# Altium PCB Buck_Eval_Board.PcbDoc
Units mil, origin at the board's own origin, x right, y up, seen from the top; angles counter-clockwise.
Board outline 1945 x 1795 mil, 4 copper layers (Top Layer, Int1 (GND), Int2 (PWR), Bottom Layer), stack 53.912 mil thick; 33 components, 11 nets, 65 pads, 140 vias.
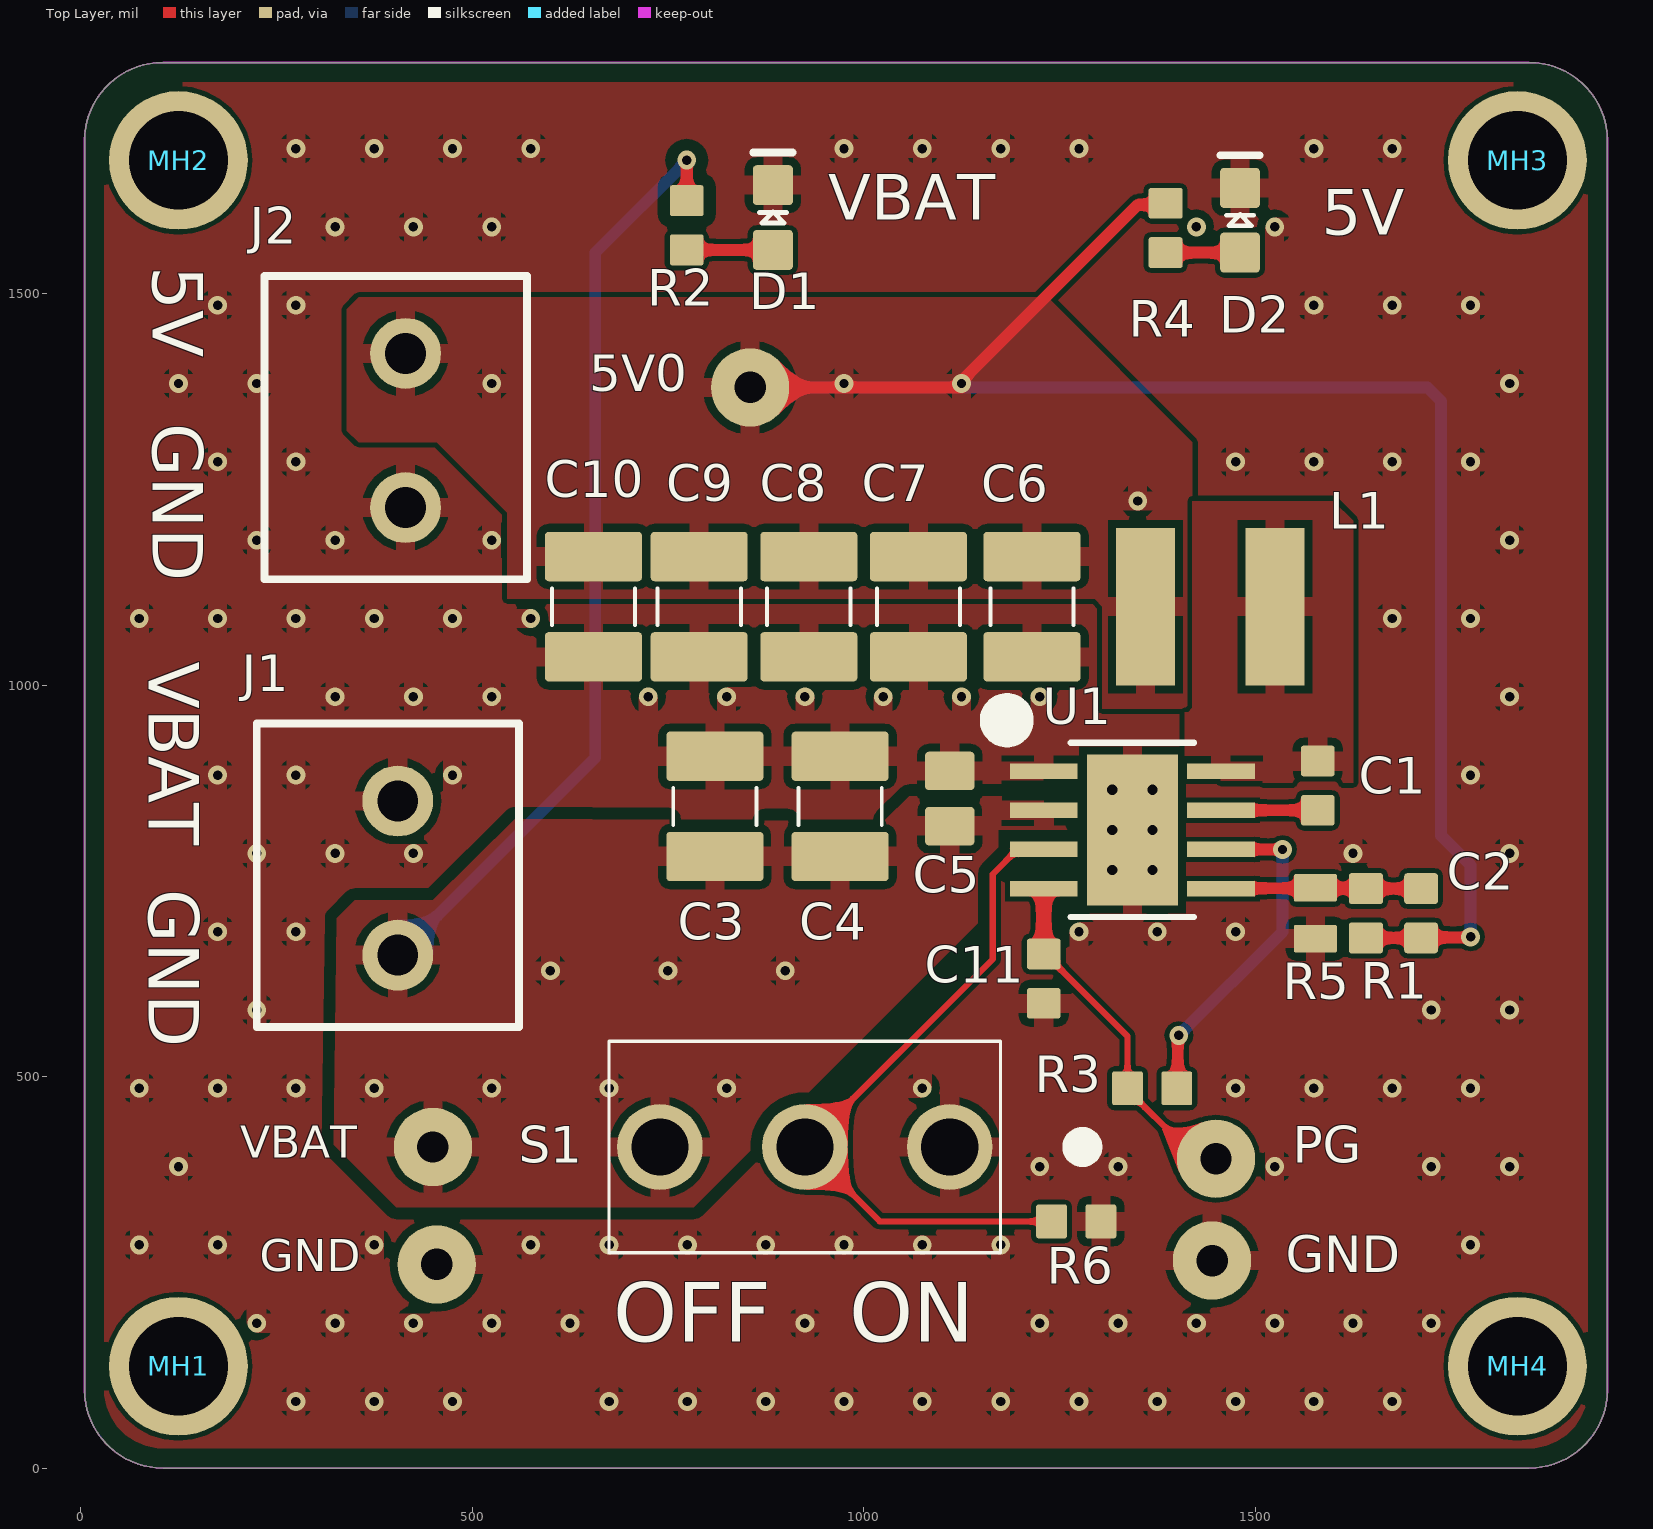
[diagram p0: Top Layer view]
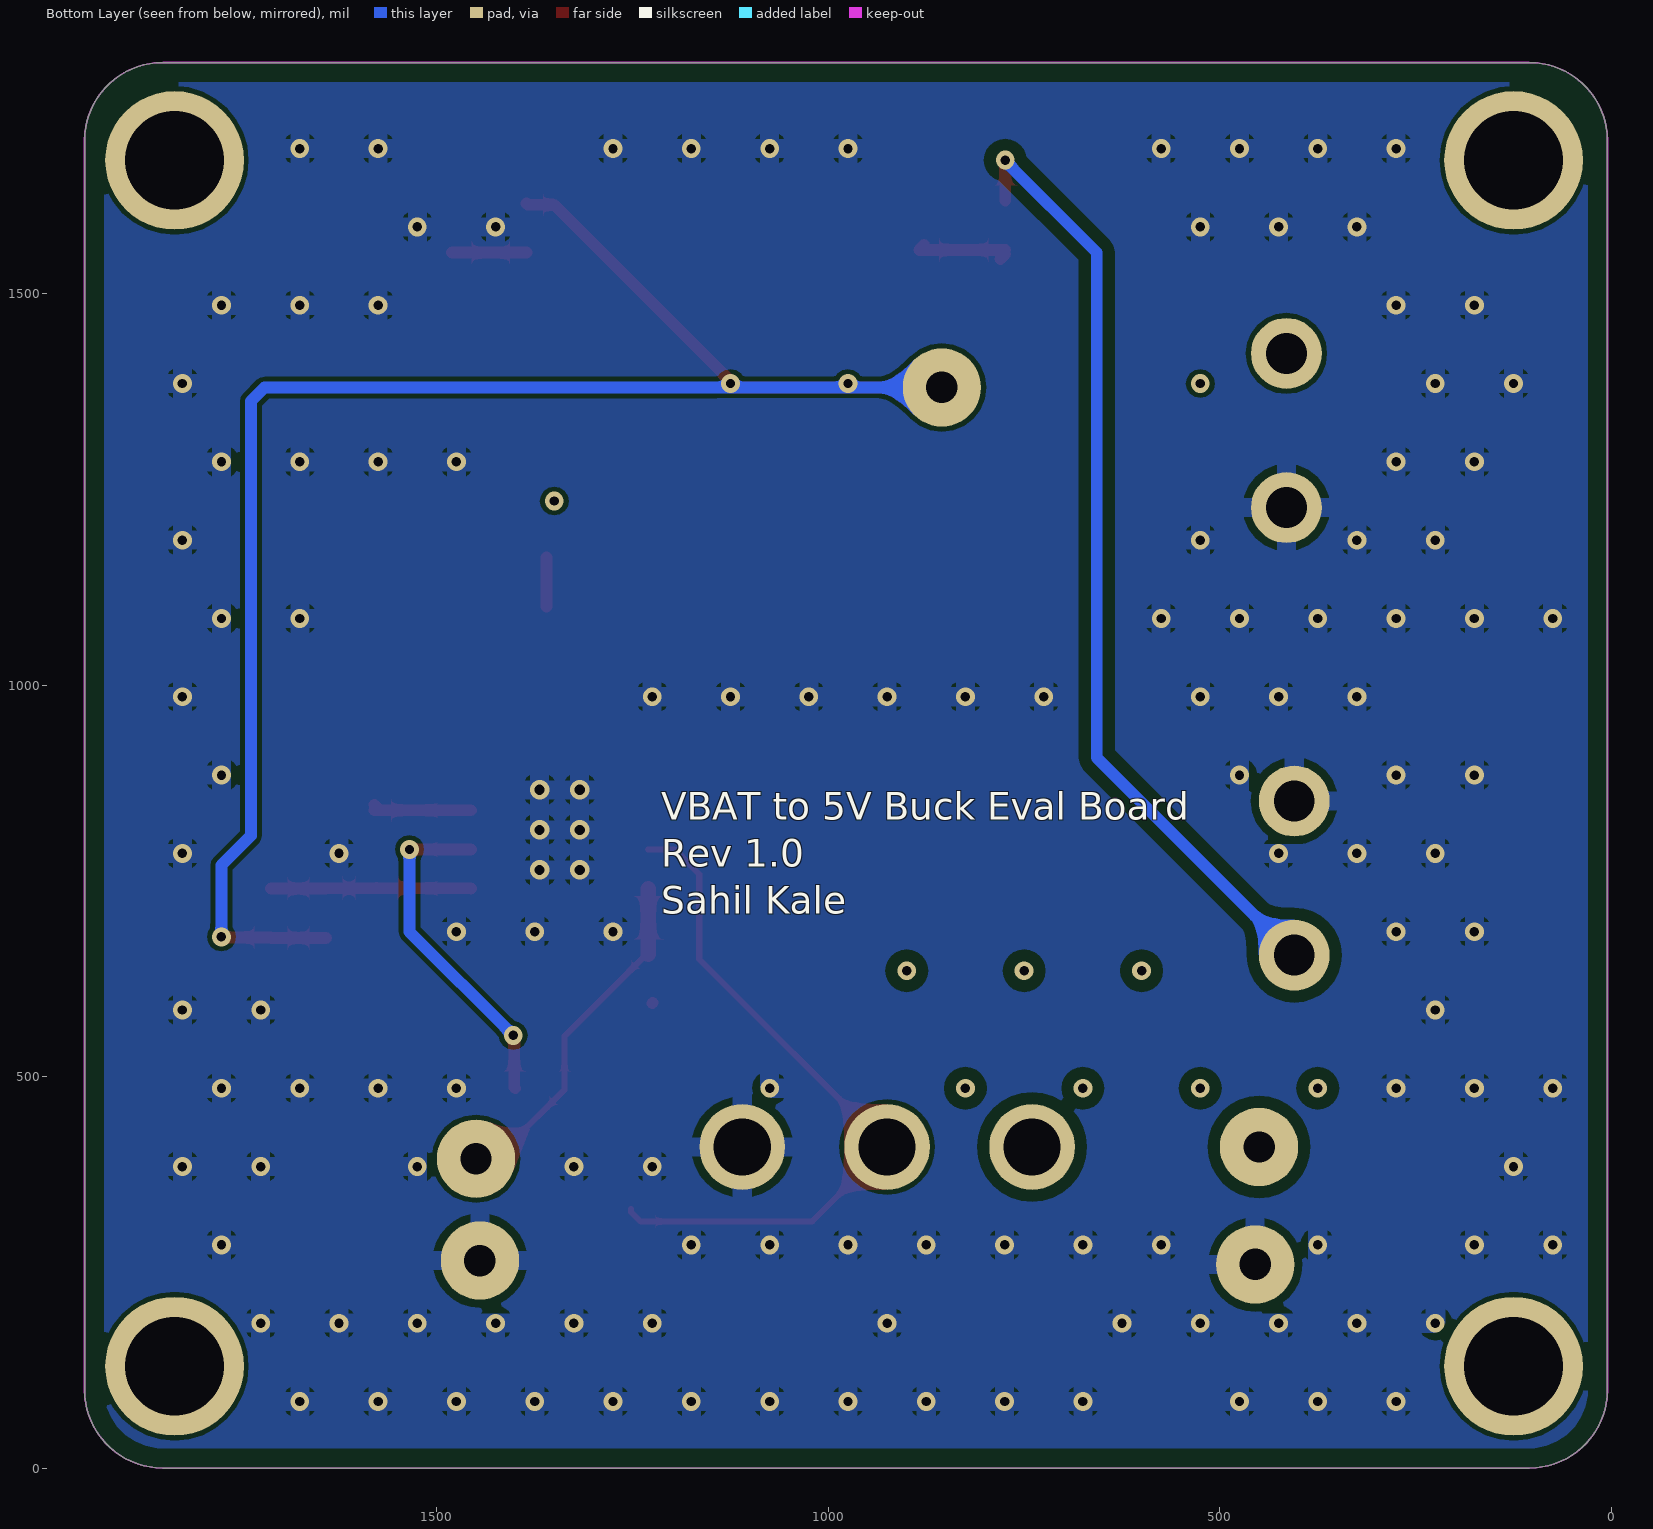
[diagram p1: Bottom Layer view, seen from below]
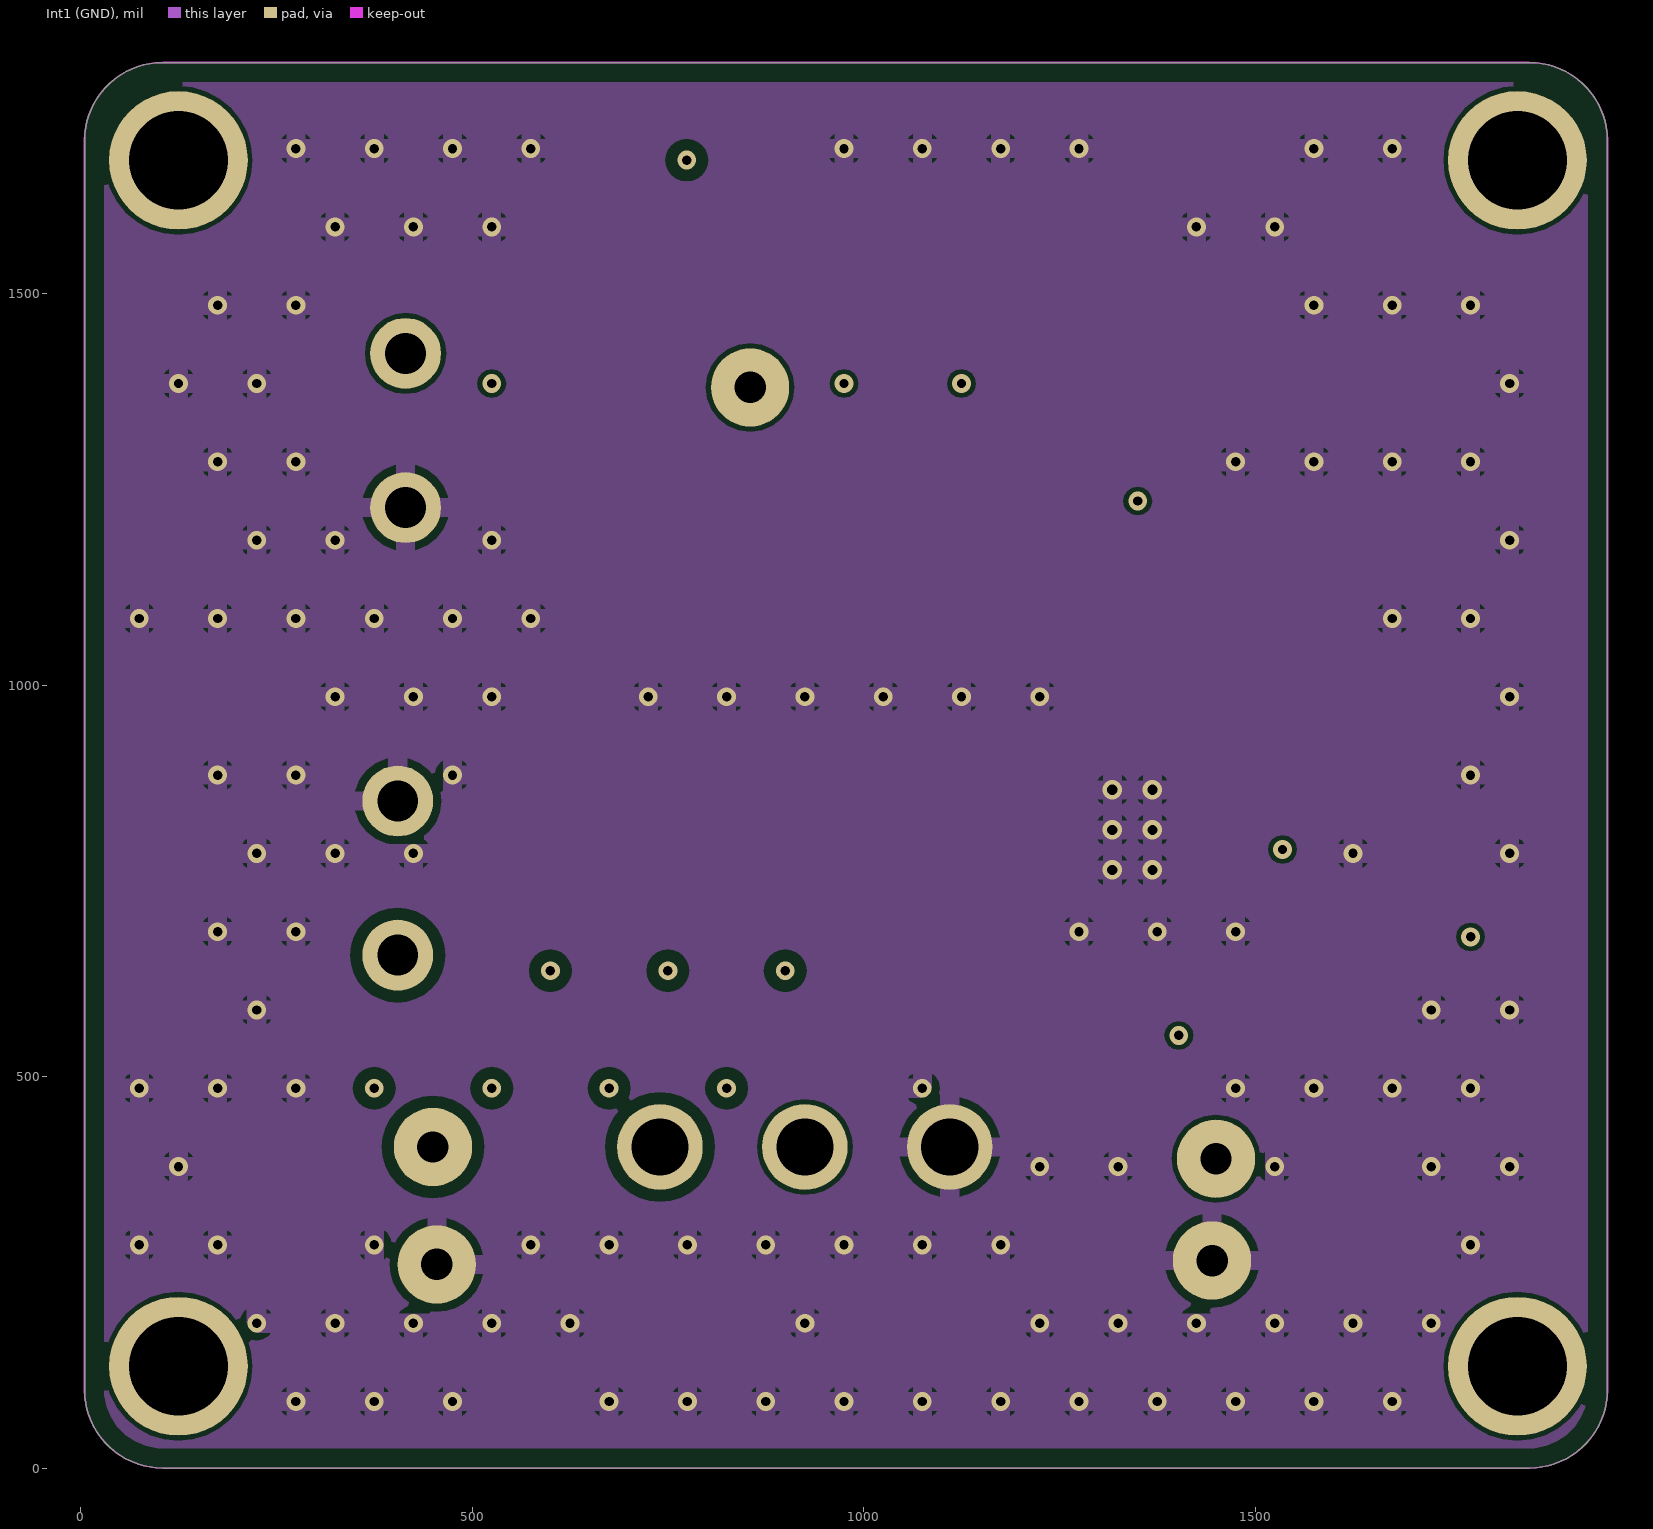
[diagram p2: Int1 (GND)]
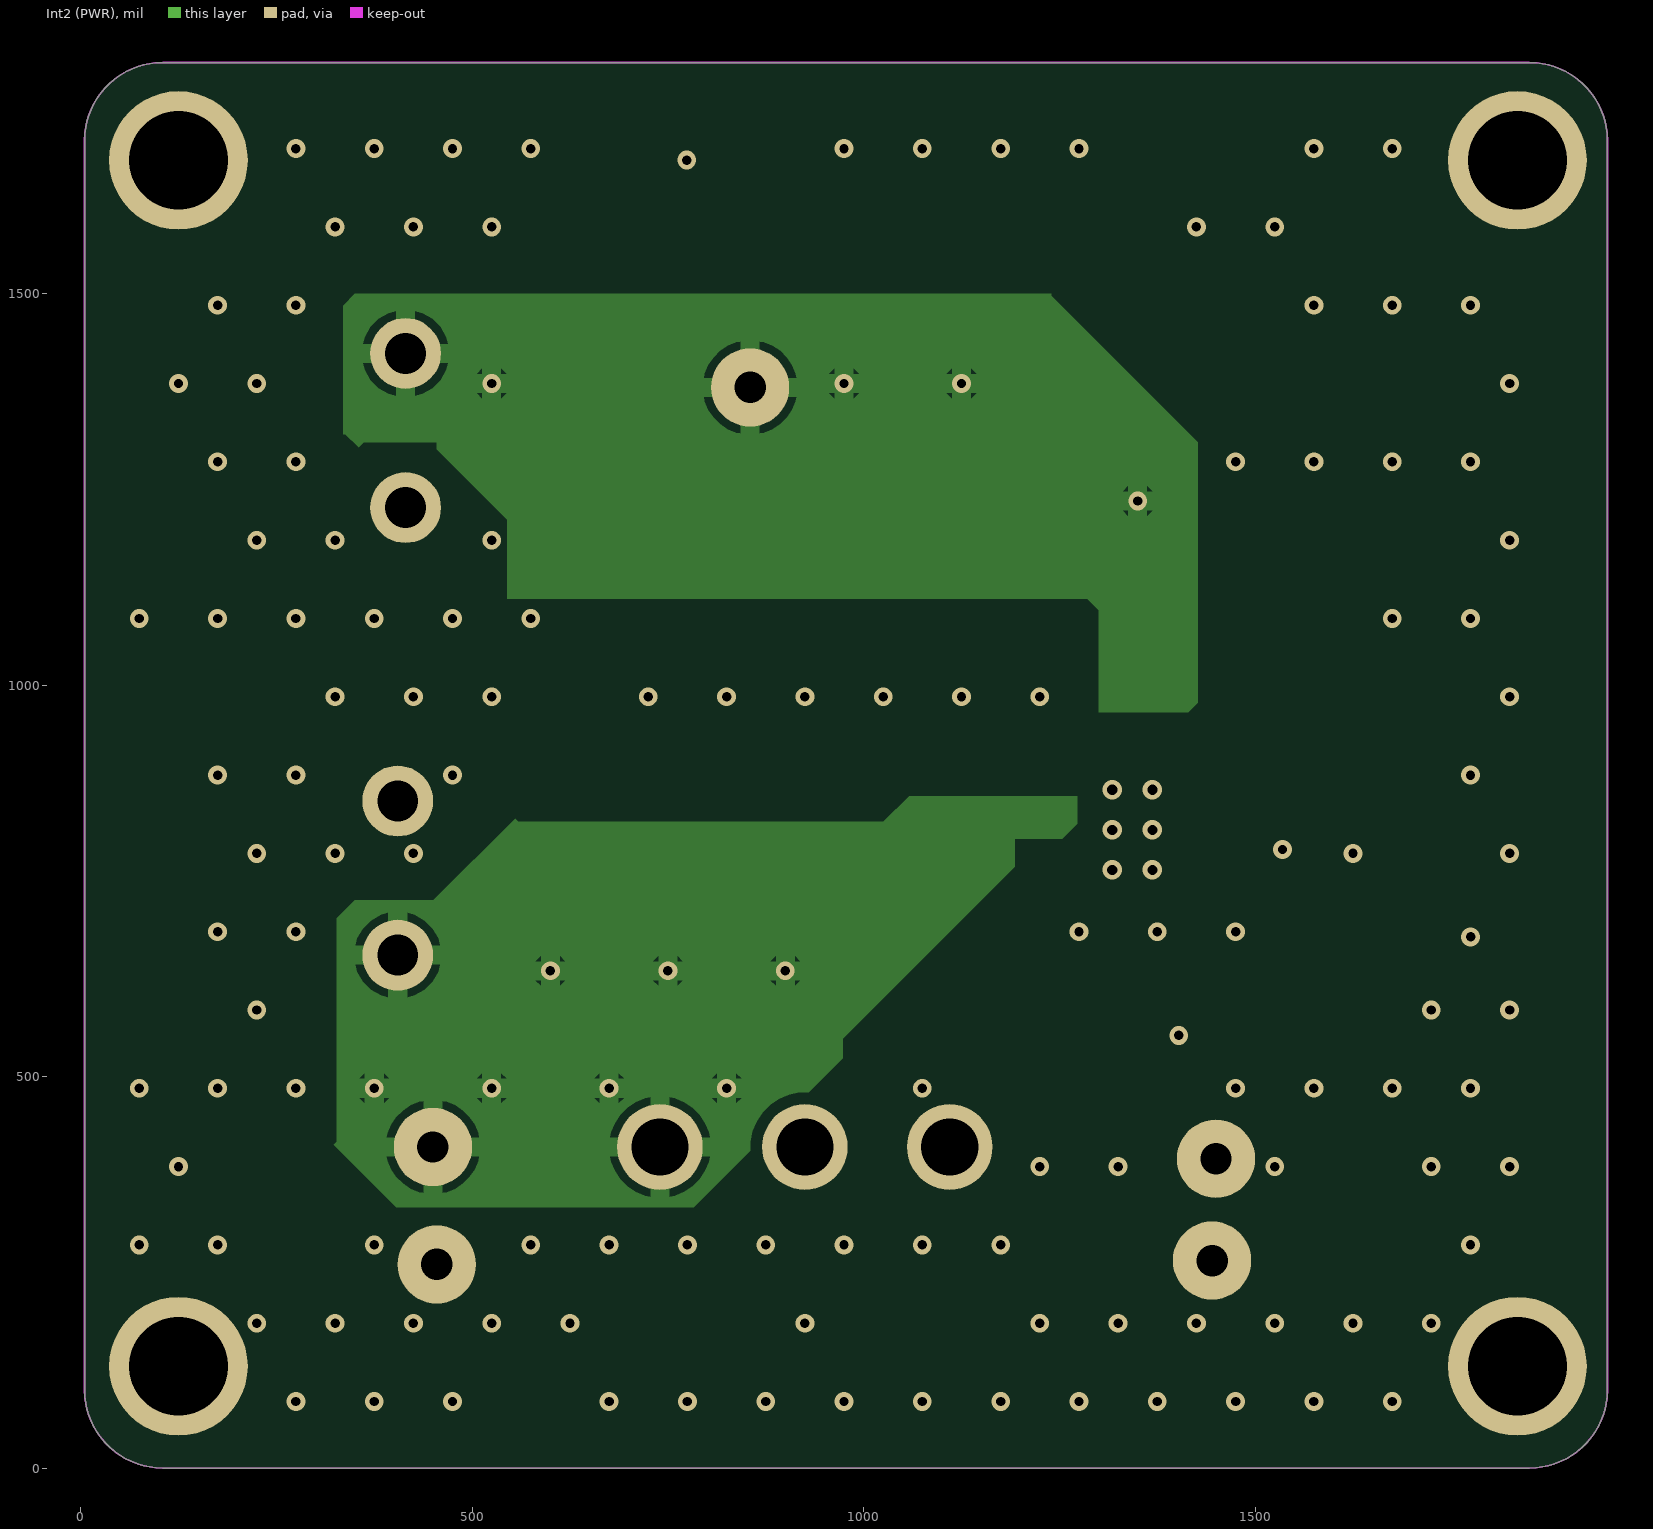
[diagram p3: Int2 (PWR)]
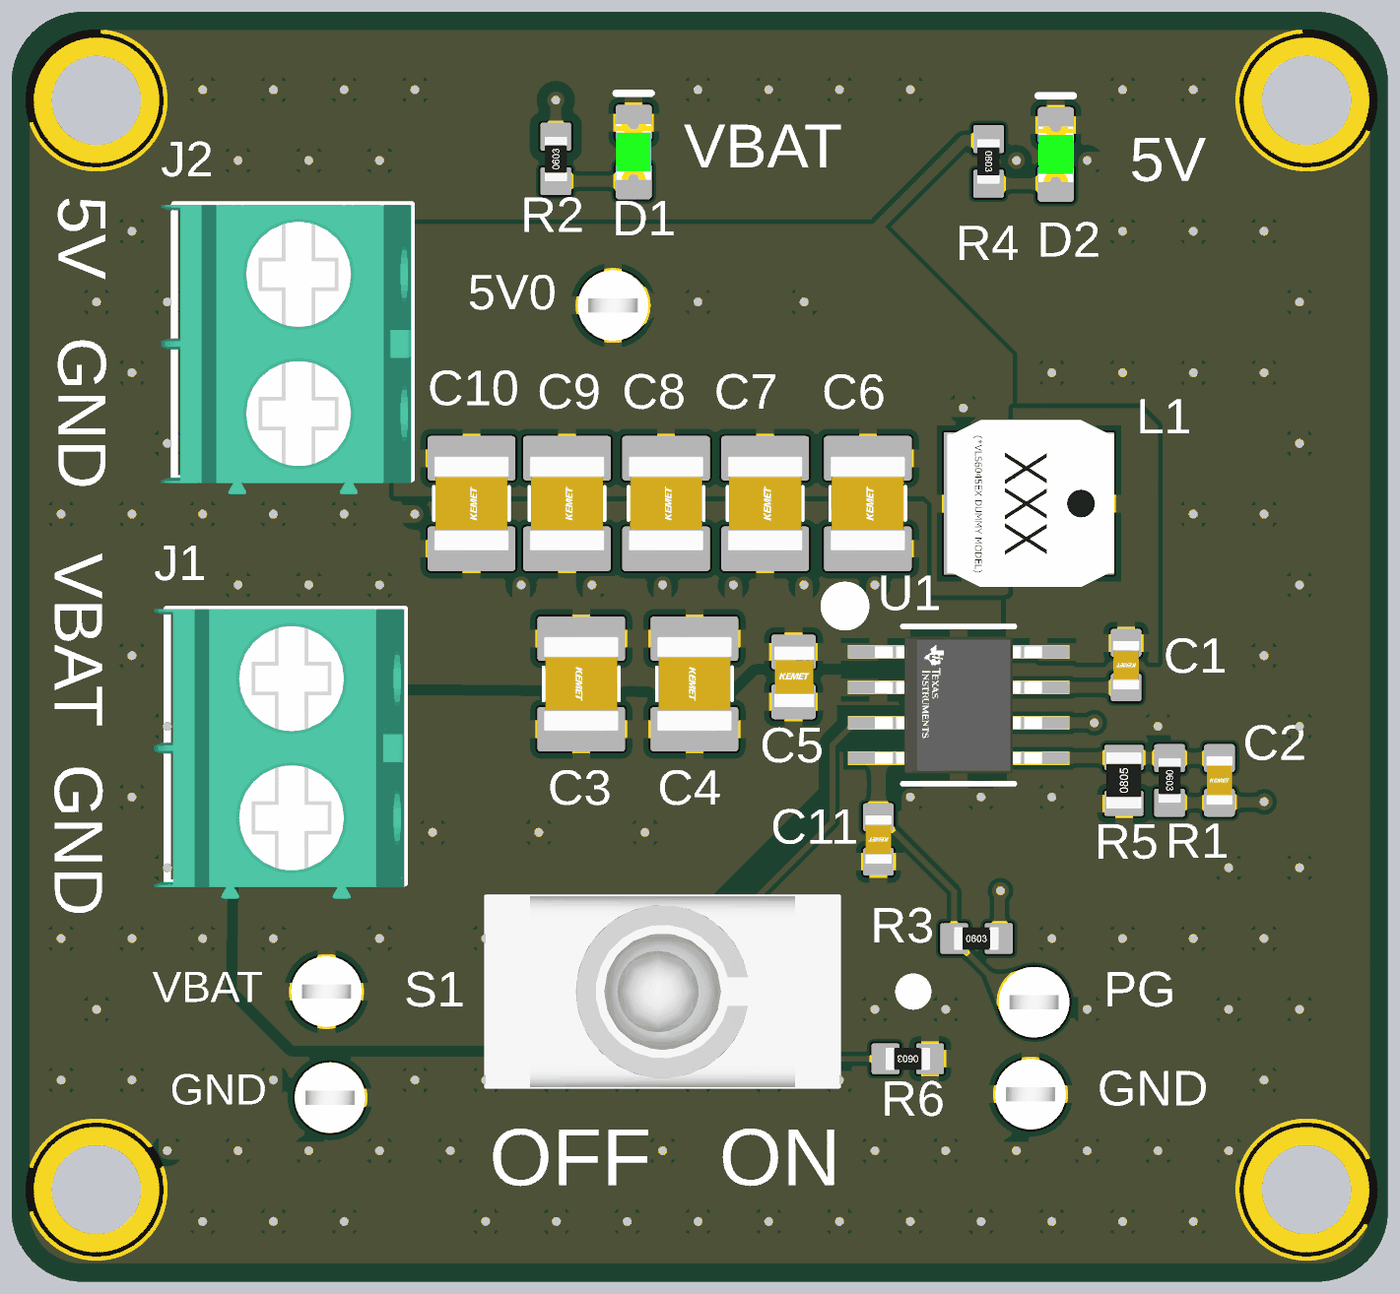
[diagram p4: 3D render of the assembled board from above, using the file's embedded part models]

## Layer stack, top to bottom
Top Solder: solder mask 1, SM-001, Dk 4
Top Layer: signal copper 1.378
Dielectric 1: prepreg 5.1, PP-017, Dk 4.3
Dielectric 2: prepreg 5.1, PP-017, Dk 4.3
Int1 (GND): signal copper 1.378
Dielectric 3: core 28, Core-039, Dk 4.8
Int2 (PWR): signal copper 1.378
Dielectric 4: prepreg 5.1, PP-017, Dk 4.3
Dielectric 5: prepreg 5.1, PP-017, Dk 4.3
Bottom Layer: signal copper 1.378
Bottom Solder: solder mask 1, SM-001, Dk 4

## Board outline
5,100 ccw(c105,100) 105,0 1850,0 ccw(c1850,100) 1950,100 1950,1695 ccw(c1850,1695) 1850,1795 105,1795 ccw(c105,1695) 5,1695

## Design rules (kind name [scope] priority, off if disabled: settings)
BoardOutlineClearance [All] p1: gap=25 ignorepadtopadclearanceinfootprint=FALSE
Clearance "Stitching GND" [IsStitchingVia and InNet('GND') vs (IsVia and (Not IsStitchingVia)) Or IsPad] p1: gap=5 ignorepadtopadclearanceinfootprint=FALSE
Clearance "Stitching 5V0" [IsStitchingVia and InNet('5V0') vs (IsVia and (Not IsStitchingVia)) Or IsPad] p2: gap=10 ignorepadtopadclearanceinfootprint=FALSE
Clearance Clearance_VBAT [InNet('VBAT')] p3: gap=15 ignorepadtopadclearanceinfootprint=TRUE
Clearance [All] p4: gap=6 ignorepadtopadclearanceinfootprint=TRUE except(10: Arc-Hole Track-Hole SMDPad-Hole THPad-Hole Via-Hole Fill-Hole Poly-Hole Region-Hole Text-Hole)
ComponentClearance [All] p1: gap=4 collisioncheckmode=3 verticalgap=4 showdistances=TRUE
HoleSize [All] p1: absolutevalues=TRUE maxlimit=248.03 minlimit=7.87 maxpercent=80.000 minpercent=20.000
HoleToHoleClearance [All] p1: gap=9.84 allowstackedmicrovias=FALSE
MinimumAnnularRing [All] p1: minimumring=3
MinimumSolderMaskSliver [All] p1: minsoldermaskwidth=0
PolygonConnect PolygonConnect_HighCurrent [InNet('VBAT') or InNet('SW') or InNet('5V0') or InNet('GND')] p1: connectstyle=Relief reliefconductorwidth=25 reliefentries=4 polygonreliefangle="90 Angle" airgapwidth=10
PolygonConnect [All] p2: thpad.connectstyle=Direct thpad.reliefconductorwidth=4 thpad.reliefentries=4 thpad.polygonreliefangle="90 Angle" thpad.airgapwidth=4 smdpad.connectstyle=Relief smdpad.reliefconductorwidth=4 smdpad.reliefentries=4 smdpad.polygonreliefangle="90 Angle" smdpad.airgapwidth=4 via.connectstyle=Direct via.reliefconductorwidth=4 via.reliefentries=4 via.polygonreliefangle="90 Angle" via.airgapwidth=4
RoutingVias [All] p1: holewidth=7.87 width=17.72 viastyle="Through Hole" minholewidth=7.87 minwidth=17.72 maxholewidth=248.03 maxwidth=257.87
SilkToSilkClearance [All] p1: silktosilkclearance=0
SilkToSolderMaskClearance [IsPad] p1: minsilkscreentomaskgap=4 clearancetoexposedcopper=TRUE
SolderMaskExpansion SolderMaskExpansion_Via [IsVia] p1: expansion=4 istentingtop=TRUE
SolderMaskExpansion [All] p2: expansion=2.95 istentingtop=FALSE
Width [All] p1: maxlimit=71497.94 minlimit=4 preferedwidth=4
24 further rules are at their usual default settings.

## Components (designator, comment, footprint, x,y, rotation, side; value= is the part's Value field where it differs from the comment)
5V0 "TESTPOINT_LOOP" TESTPOINT_LOOP 855,1380 r0 top (schematic designator TP2)
C1 "CAP_0.1uF_50V_0603" CAP0603 1580,871.5 r90 top value=0.1μF
C2 "CAP_6.8pF_50V_0603" CAP0603 1711.96,708.5 r270 top value=6.8pF
C3 "CAP_10uF_100V_1210" CAP1210 810,845 r270 top value=10μF
C4 "CAP_10uF_100V_1210" CAP1210 970,845 r270 top value=10μF
C5 "CAP_0.22uF_50V_0805" CAP2012 1110,855 r270 top value=0.22μF
C6 "CAP_10uF_100V_1210" CAP1210 1215,1100 r90 top value=10μF
C7 "CAP_10uF_100V_1210" CAP1210 1070,1100 r90 top value=10μF
C8 "CAP_10uF_100V_1210" CAP1210 930,1100 r90 top value=10μF
C9 "CAP_10uF_100V_1210" CAP1210 790,1100 r90 top value=10μF
C10 "CAP_10uF_100V_1210" CAP1210 655,1100 r90 top value=10μF
C11 "CAP_1uF_25V_0603" CAP0603 1230,625 r90 top value=1μF
D1 "LED_GREEN" LED_0805_GREEN 884.11,1597 r90 top
D2 "LED_GREEN" LED_0805_GREEN 1480.66,1593.55 r90 top
GND "TESTPOINT_LOOP" TESTPOINT_LOOP 455,260 r0 top (schematic designator TP4)
GND "TESTPOINT_LOOP" TESTPOINT_LOOP 1445,265 r0 top (schematic designator TP5)
J1 "CON_2POS_SCREW_TERM" 1935161 405,753.43 r270 top
J2 "CON_2POS_SCREW_TERM" 1935161 415,1325 r270 top
L1 "IND_4.7uH_4.2A" VLS6045EX-4R7M 1525.35,1100 r180 top
MH1 "MOUNTING_HOLE_M3" MOUNTING_HOLE_3mm#1 125,130 r0 top
MH2 "MOUNTING_HOLE_M3" MOUNTING_HOLE_3mm#2 155,1670 r0 top
MH3 "MOUNTING_HOLE_M3" MOUNTING_HOLE_3mm#1 1835,1670 r0 top
MH4 "MOUNTING_HOLE_M3" MOUNTING_HOLE_3mm#1 1835,130 r0 top
PG "TESTPOINT_LOOP" TESTPOINT_LOOP 1450,395 r0 top (schematic designator TP3)
R1 "RES_100kΩ_0603_1%" RESC0603 1641.51,740 r270 top value=100kΩ
R2 "RES_4.7kΩ_0603" RESC0603 774.11,1555.66 r90 top value=4.7kΩ
R3 "RES_100kΩ_0603_1%" RESC0603 1337.01,485 r0 top value=100kΩ
R4 "RES_510Ω_0603" RESC0603 1385.66,1615.21 r270 top value=510Ω
R5 "RES_24.9kΩ_0805_1%_1" RESC0805 1576.96,708.5 r90 top value=24.9kΩ
R6 "RES_100kΩ_0603_1%" RESC0603 1302.99,315 r180 top value=100kΩ
S1 "SW_TOGGLE_SPDT" 100SP1T1B4M2QE 924.96,410 r180 top
U1 "BUCK_LMR33640DDDAR" "8-SO PowerPad" 1343.19,815 r0 top
VBAT "TESTPOINT_LOOP" TESTPOINT_LOOP 450,410 r0 top (schematic designator TP1)

## Footprints (in the part's own frame and the unit in brackets; to place one, negate y for a bottom-side part, rotate by r counter-clockwise, add the part's x,y. Pads: shape width x height; smd on the part's side, far side on the other; paste and mask are expansions set on the pad)
"8-SO PowerPad" [mm]
  rect 2.2x0.5 smd paste-1000 mask+0: 1(-2.875,1.905) 2(-2.875,0.635) 3(-2.875,-0.635) 4(-2.875,-1.905) 5(2.875,-1.905) 6(2.875,-0.635) 7(2.875,0.635) 8(2.875,1.905)
  rect 2.95x4.9 smd paste-1000 mask-1000: 9(0,0)
  silkscreen extent -4.51,-2.83 2,3.99, body extent -4.08,-2.68 4.08,2.68, height 0.25
100SP1T1B4M2QE [mm]
  round 2.775 hole 1.85: 1(-4.7,0) 2(0,0) 3(4.7,0)
  silkscreen extent -9.3,-3.43 6.35,3.43, body extent -6.35,-3.43 6.35,3.43, height 29.63
1935161 [mm] "TERM BLK 2POS SIDE ENTRY 5MM PCB"
  round 2.3 hole 1.325: 1(-2.5,0) 2(2.5,0)
  silkscreen extent -5.01,-4.57 4.83,3.94, body extent -5.01,-5.06 5.39,3.94, height 11.41
CAP0603 [mm]
  rrect20% 1x1.1 smd: 1(-0.8,0) 2(0.8,0)
  body extent -0.87,-0.48 0.88,0.48, height 0.87
CAP1210 [mm]
  rrect15% 1.6x3.15 smd: 1(-1.625,0) 2(1.625,0)
  silkscreen extent -0.6,-1.35 0.6,1.35, body extent -1.7,-1.35 1.7,1.35, height 2.1
CAP2012 [mm]
  rrect20% 1.25x1.6 smd: 1(-0.895,0) 2(0.895,0)
  body extent -1.1,-0.7 1.1,0.75, height 1.41
LED_0805_GREEN [mm] "SMD, 2-Leads, Body 2x1.25mm"
  rrect20% 1.3x1.3 smd: 1(-1.05,0) 2(1.05,0)
  silkscreen extent -0.18,-0.63 2.11,0.64, body extent -1,-0.62 1,0.63, height 1.12
MOUNTING_HOLE_3mm#1 [mm] "3mm Hole"
  round 4.5 hole 3.2 mask+0.3: 0(0,0)
MOUNTING_HOLE_3mm#2 [mm] "3mm Hole"
  round 4.5 hole 3.2 mask+0.3: 0(-0.762,0)
RESC0603 [mm] "Chip Resistor, Body 1.6x0.8mm, IPC Medium Density"
  rrect15% 1x1.1 smd: 1(0,0) 2(1.6,0)
  body extent 0,-0.4 1.6,0.4, height 0.46
RESC0805 [mm] "Chip Resistor, 2-Leads, Body 2.00x1.25mm, IPC High Density"
  rrect15% 0.9x1.4 smd: 1(-0.825,0) 2(0.825,0)
  body extent -1,-0.62 1,0.63, height 0.61
TESTPOINT_LOOP [mm]
  round 2.54 hole 1.02: 1(0,0)
  body extent -1.27,-1.27 1.27,1.27, height 4.57
VLS6045EX-4R7M [mm]
  rect 1.9x5.1 smd: 1(0,0) 2(4.2,0)
  body extent -0.97,-3 5.03,3, height 4.5

## Part data
5V0 GND GND PG VBAT: "TESTPOINT THRUHOLE", Manufacturer 1="Keystone Electronics", Manufacturer Part Number 1=5002, Package/Footprint=TH, Supplier Part Number 1=36-5002-ND, Mounting Type=TH, Supplier 1=Digi-Key
C1: "CAP CER 0.1UF 50V X7R 0603", Dielectric=X7R, Manufacturer 1=Yageo, Manufacturer Part Number 1=CC0603KRX7R9BB104, Package/Footprint=0603, Supplier Part Number 1=311-1344-1-ND, Voltage Rating=50V, Mounting Type=SMD, Supplier 1=Digi-Key
C2: "CAP CER 6.8PF 50V", Dielectric=C0G, Manufacturer 1=Yageo, Manufacturer Part Number 1=CGA3E2C0G1H6R8D080AD, Package/Footprint=0603, Supplier Part Number 1=445-9798-1-ND, Voltage Rating=50V, Mounting Type=SMD, Supplier 1=Digi-Key, Supplier Part Number 21=445-9798-1-ND
C3 C4 C6 C7 C8 C9 C10: "CAP CER 10uF 100V X7S 10% 1210", Dielectric=X7S, Manufacturer 1=Murata, Manufacturer Part Number 1=GRM32EC72A106KE05L, Package/Footprint=1210, Supplier Part Number 1=490-16266-1-ND, Voltage Rating=100V, Mounting Type=SMD, Supplier 1=Digi-Key
C5: "CAP CER 0.22UF 50V X7R 0805", Dielectric=X7R, LCSC Part #=C5378, Manufacturer 1=KEMET, Manufacturer Part Number 1=C0805C224K5RACTU, Package/Footprint=0805, Supplier Part Number 1=399-3491-1-ND, Voltage Rating=50V, Mounting Type=SMD, Supplier 1=Digi-Key
C11: "CAP CER 1UF 25V X5R 0603", Dielectric=X5R, Manufacturer 1=Samsung, Manufacturer Part Number 1=CL10A105KA8NNNC, Package/Footprint=0603, Supplier Part Number 1=1276-1102-1-ND, Voltage Rating=25V, Mounting Type=SMD, Supplier 1=Digi-Key
D1 D2: "LED GREEN DIFFUSED 0805 SMD", Forward Voltage Drop=2.2V, Manufacturer 1=OSRAM, Manufacturer Part Number 1="LG R971-KN-1", Package/Footprint=0805, Supplier Part Number 1=475-1410-1-ND, Mounting Type=SMD, Supplier 1=Digi-Key
J1 J2: "TERM BLK 2POS SIDE ENTRY 5MM", Manufacturer 1="Phoenix Contact", Manufacturer Part Number 1=1935161, Package/Footprint=SMD, Supplier Part Number 1=277-1667-ND, Mounting Type=TH, Supplier 1=Digi-Key
L1: "FIXED IND 4.7UH 4.2A 35MOHM SMD", Case/Size Code=2424, DC Resistance (DCR)=27mR, Inductance-Nom (L)=4.7uH, Inductor Application="POWER INDUCTOR", Inductor Type="GENERAL PURPOSE INDUCTOR", Manufacturer=TDK, Manufacturer Part Number 1=VLS6045EX-4R7M, Max Operating Temperature=105°C, Min Operating Temperature=-40°C, Package Height=4.5mm, Package Length=6mm, Package Style=SMTMeter, Rated Current-Max=4.2A, Supplier Part Number 1=445-173055-1-ND, Test Frequency=100kHz, Tolerance=20%, Category="Fixed Inductors", ComponentLink1Description=https://datasheet.ciiva.com:443/pdfs/VipMasterIC/IC/TDKC/TDKC-S-A0006138306/TDKC-S-A0006138306-1.pdf?src-supplier=IHS+Markit, ComponentLink1URL=https://datasheet.ciiva.com:443/pdfs/VipMasterIC/IC/TDKC/TDKC-S-A0006138306/TDKC-S-A0006138306-1.pdf?src-supplier=IHS+Markit, ComponentLink2Description=http://www.farnell.com/datasheets/2724083.pdf?src-supplier=Farnell, ComponentLink2URL=http://www.farnell.com/datasheets/2724083.pdf?src-supplier=Farnell, ComponentLink3Description=https://media.digikey.com/pdf/Data%20Sheets/TDK%20PDFs/VLS-EX_Series_Br.pdf?src-supplier=Digi-Key, ComponentLink3URL=https://media.digikey.com/pdf/Data%20Sheets/TDK%20PDFs/VLS-EX_Series_Br.pdf?src-supplier=Digi-Key, ComponentLink4Description=http://www.farnell.com/datasheets/2724083.pdf?src-supplier=Newark, ComponentLink4URL=http://www.farnell.com/datasheets/2724083.pdf?src-supplier=Newark, ComponentLink5Description=https://product.tdk.com/info/en/catalog/datasheets/inductor_commercial_power_vls6045ex_en.pdf?src-supplier=Digi-Key, ComponentLink5URL=https://product.tdk.com/info/en/catalog/datasheets/inductor_commercial_power_vls6045ex_en.pdf?src-supplier=Digi-Key, ComponentLink6Description=http://www.farnell.com/datasheets/2724083.pdf?src-supplier=Element14, ComponentLink6URL=http://www.farnell.com/datasheets/2724083.pdf?src-supplier=Element14, Construction=Rectangular, Core Material=Ferrite, Mounting Type=Surface, Number of Functions=1, Number of Pins=2, Package Width=6mm, Packaging="Cut Tape", Pricing 1="1=0.46000, 10=0.40200, 25=0.37360, 50=0.31620, 100=0.28750, 250=0.27024, 500=0.24150 (USD)", REACH SVHC=Yes, RoHS=Yes, RoHS Compliant=Yes, Shape/Size Description="RECTANGULAR PACKAGE", Shielding=Shielded, Stock 1=9330, Supplier 1=Digi-Key, Surface Mount=Yes, Terminal Placement="Dual Ended", Termination="One Surface", Verified=No
R1 R3 R6: "RES 100K OHM 1% 1/10W 0603", Manufacturer 1=Yageo, Manufacturer Part Number 1=RC0603FR-07100KL, Package/Footprint=0603, Supplier Part Number 1=311-100KHRCT-ND, Mounting Type=SMD, Supplier 1=Digi-Key
R2: library part RES_4.7kΩ_0603_5%, "RES 4.7K OHM 5% 1/10W 0603", Manufacturer 1=Yageo, Manufacturer Part Number 1=RC0603JR-074K7L, Supplier Part Number 1=311-4.7KGRCT-ND, Supplier 1=Digi-Key
R4: library part RES_510Ω_0603_5%, "RES 510 OHM 5% 1/10W 0603", Manufacturer 1="Vishay Dale", Manufacturer Part Number 1=CRCW0603510RJNEA, Package=0603, Supplier Part Number 1=541-510GCT-ND, Supplier 1=Digi-Key
R5: "RES 24.9K OHM 1% 1/8W 0805", Manufacturer 1="Stackpole Electronics Inc", Manufacturer Part Number 1=RMCF0805FT24K9CT-ND, Package/Footprint=0805, Supplier Part Number 1=RMCF0805FT24K9, Mounting Type=SMD, Supplier 1=Digi-Key
S1: "SWITCH TOGGLE SPDT 5A 120V", Manufacturer 1=E-Switch, Manufacturer Part Number 1=100SP1T1B4M2QE, Package/Footprint=TH, Supplier Part Number 1=EG2355-ND, Voltage Rating (DC)=28V, Mounting Type=TH, Supplier 1=Digi-Key, Throw Configuration=SPDT
U1: "IC REG BUCK ADJUSTABLE 4A 8SOPWR", Current Output=4A, Manufacturer="Texas Instruments", Manufacturer Part Number 1=LMR33640DDDAR, Supplier Part Number 1=296-LMR33640DDDARCT-ND, Switching Frequency="1 MHz", Voltage - Input Max="36 V", Voltage - Input Min="3.8 V", Category="Voltage Regulators - Switching", ComponentLink1Description=https://www.ti.com:443/lit/ds/symlink/lmr33640.pdf?src-supplier=IHS+Markit, ComponentLink1URL=https://www.ti.com:443/lit/ds/symlink/lmr33640.pdf?src-supplier=IHS+Markit, Pricing 1="1=2.66000, 10=2.38800, 25=2.25240, 100=1.80200, 250=1.57676, 500=1.53170, 1000=1.21635 (USD)", RoHS=No, Stock 1=3018, Supplier 1=Digi-Key, Verified=No

## Via types
v1: diameter 24, hole 12, Top Layer to Bottom Layer, tented both sides, 134 vias
v2: diameter 24.8, hole 12.99, Top Layer to Bottom Layer, 6 vias

## Nets (pads, with @x,y where several pads share a name; then routed paths per layer and width w, separated by ;. In a path a pad name is that pad's centre, name@x,y a point inside that pad or via, vN(x,y) a via of type N, cw(c..) or ccw(c..) an arc to the next point about the centre after c; other vN are vias at no path point)
5V0: 5V0.1 C2.2 C6.2 C7.2 C8.2 C9.2 C10.2 J2.1 L1.2 R1.2 R4.1 | length 2414.4
  Top Layer w15: 5V0.1 975,1380 v1@1125,1380 ; v1(1125,1385) 1126.72,1386.72 1126.72,1389.73 1350.29,1613.3 1383.96,1613.3 R4.1@1385.66,1615 ; L1.2 L1.2@1360,1162.99 ; R1.2 C2.2 1712.6,677.65 1774.48,677.65 v1(1775.12,678.29)
  Bottom Layer w15: 5V0.1 975,1380 1125,1380 1720,1380 1737.5,1362.5 1737.5,807.5 1775.12,769.88 v1(1775.12,678.29)
  other v1: 1350,1235 525,1385 975,1385
BOOT: C1.1 U1.7 | length 133.5
  Top Layer w15: U1.7 C1.1@1572.99,840 ; C1.1 C1.1@1572.99,840 ; C1.1@1580,847.01 C1.1@1572.99,840
EN: R6.2 S1.2 U1.3 | length 901.1
  Top Layer w8: U1.3 1196.54,790 1165,758.46 1165,650.04 S1.2 925.42,410 1020.42,315 R6.2 1252.19,327.19 R6.2@1252.19,330.74
FB: C2.1 R1.1 R5.2 U1.5 | length 256.4
  Top Layer w15: U1.5 1456.87,740.49 1576.47,740.49 R5.2 1577.45,740.49 1641.02,740.49 R1.1 C2.1
GND: C3.1 C4.1 C5.1 C6.1 C7.1 C8.1 C9.1 C10.1 C11.1 D1.2 D2.2 GND.1 J1.1 J2.2 R5.1 R6.1 S1.1 U1.1 U1.9 | length 1.1
  Top Layer w15: C11.1@1224.25,594.25 C11.1@1225,593.5
  other v1: 275,85 375,85 475,85 675,85 775,85 875,85 975,85 1075,85 1175,85 1275,85 1375,85 1475,85 1575,85 1675,85 225,185 325,185 425,185 525,185 625,185 925,185 1225,185 1325,185 1425,185 1525,185 1625,185 1725,185 75,285 175,285 375,285 575,285 675,285 775,285 875,285 975,285 1075,285 1175,285 1775,285 125,385 1225,385 1325,385 1525,385 1725,385 1825,385 75,485 175,485 275,485 1075,485 1475,485 1575,485 1675,485 1775,485 225,585 1725,585 1825,585 175,685 275,685 1275,685 1375,685 1475,685 225,785 325,785 425,785 1625,785 1825,785 175,885 275,885 475,885 1775,885 325,985 425,985 525,985 725,985 825,985 925,985 1025,985 1125,985 1225,985 1825,985 75,1085 175,1085 275,1085 375,1085 475,1085 575,1085 1675,1085 1775,1085 225,1185 325,1185 525,1185 1825,1185 175,1285 275,1285 1475,1285 1575,1285 1675,1285 1775,1285 125,1385 225,1385 1825,1385 175,1485 275,1485 1575,1485 1675,1485 1775,1485 325,1585 425,1585 525,1585 1425,1585 1525,1585 275,1685 375,1685 475,1685 575,1685 975,1685 1075,1685 1175,1685 1275,1685 1575,1685 1675,1685
  other v2: 1317.6,763.82 1368.78,763.82 1317.6,815 1368.78,815 1317.6,866.18 1368.78,866.18
NetD1_1: D1.1 R2.1 | length 127.9
  Top Layer w15: R2.1@774.11,1550.35 R2.1@780.45,1544.01 ; R2.1 D1.1 D1.1@877.77,1562
NetD2_1: D2.1 R4.2 | length 95
  Top Layer w15: R4.2 D2.1
NetR3_2: R3.2 U1.6 | length 439.5
  Top Layer w15: R3.2 1401.25,486.25 1401.25,551.25 v1(1402.5,552.5) ; U1.6 v1(1535,790)
  Bottom Layer w15: v1(1402.5,552.5) 1535,685 v1(1535,790)
PG: C11.2 PG.1 R3.1 U1.4 | length 451.9
  Top Layer w8: C11.2 1231.97,656.5 1337.01,551.46 R3.1 1337.01,483.03 1407.44,412.6 1432.4,412.6 PG.1
  Top Layer w20: C11.2 U1.4
SW: C1.2 L1.1 U1.8
VBAT: C3.2 C4.2 C5.2 J1.2 R2.2 S1.3 U1.2 VBAT.1 | length 1219.6
  Top Layer w15: R2.2 v1(774.11,1670.35)
  Bottom Layer w15: J1.2 657.37,907.37 657.37,1552.37 v1@774.73,1669.73
  other v1: 375,485 525,485 675,485 825,485 600,635 750,635 900,635
pads on no net: MH1.0 MH2.0 MH3.0 MH4.0

## Polygon pours and split planes (outlines as drawn)
GND on Top Layer "GND_L01" (solid, remove dead copper, pour order 18): 5,100 ccw(c105,100) 105,0 1850,0 ccw(c1850,100) 1950,100 1950,1695 ccw(c1850,1695) 1850,1795 105,1795 ccw(c105,1695) 5,1695
5V0 on Top Layer "5V0_L01_P014" (solid, remove dead copper, pour order 14): 340,1480 355,1495 1235,1495 1420,1310 1420,975 1415,970 1305,970 1305,1100 1295,1110 545,1110 545,1220 455,1310 355,1310 340,1325
VBAT on Top Layer "VBAT_L01_P003" (solid, remove dead copper, pour order 3): 1193.08,803.84 1253.84,803.84 1273.08,823.08 1273.08,858.08 1058.08,858.08 1025.32,825.32 554.99,829.34 450,725 350,725 327.43,702.43 323.57,412.59 403.08,333.08 783.08,333.08 973.08,523.08 1193.08,743.08
SW on Top Layer "SW_L01_P011" (solid, remove dead copper, pour order 11): 1420,1235 1420,970.67 1414.33,965 1410,965 1410,914.14 1410,875 1557.8,875 1561.3,878.5 1564.8,875 1625,875 1625,1210 1600,1235
5V0 on Int2 (PWR) "5V0_L03_P024" (solid, remove dead copper, pour order 24): 545,1110 545,1210.82 455,1300.82 455,1310 361.49,1310 355,1303.51 338.1,1320.41 335.41,1320.41 335.41,1484.59 350.41,1499.59 1239.59,1499.59 1239.59,1496.9 1426.49,1310 1426.49,977.16 1414.74,965.41 1300.41,965.41 1300.41,1095.41 1285.82,1110
VBAT on Int2 (PWR) "VBAT_L03_P021" (solid, remove dead copper, pour order 21): 554.99,829.34 559.01,825.32 1025.32,825.32 1058.08,858.08 1273.08,858.08 1273.08,823.08 1253.84,803.84 1193.08,803.84 1193.08,768.08 973.08,548.08 973.08,523.08 783.08,333.08 403.08,333.08 323.57,412.59 327.43,416.45 327.43,702.43 350,725 450.65,725
GND on Bottom Layer "GND_L04" (solid, remove dead copper, pour order 19): 5,100 ccw(c105,100) 105,0 1850,0 ccw(c1850,100) 1950,100 1950,1695 ccw(c1850,1695) 1850,1795 105,1795 ccw(c105,1695) 5,1695
GND on Int1 (GND) "GND_L02" (solid, remove dead copper, pour order 20): 5,100 ccw(c105,100) 105,0 1850,0 ccw(c1850,100) 1950,100 1950,1695 ccw(c1850,1695) 1850,1795 105,1795 ccw(c105,1695) 5,1695

## Keep-outs
Keep-Out Layer:
  the board outline again, w2

## Silkscreen, mask and mechanical layers (free items; w line width, h text height)
Top Overlay:
  text "VBAT" at 955,1575 h100
  text "5V" at 1585,1556.1 h100
  text "5V   GND" at 71.21,1535 h110 r270
  text "VBAT  GND" at 66.21,1030 h110 r270
  text "OFF   ON" at 680,136.42 h130
Bottom Overlay:
  text "VBAT to 5V Buck Eval Board / Rev 1.0 / Sahil Kale" at 1213.69,696.7 h60